# EAGLE board M1091X (EAGLE 6.6.0)
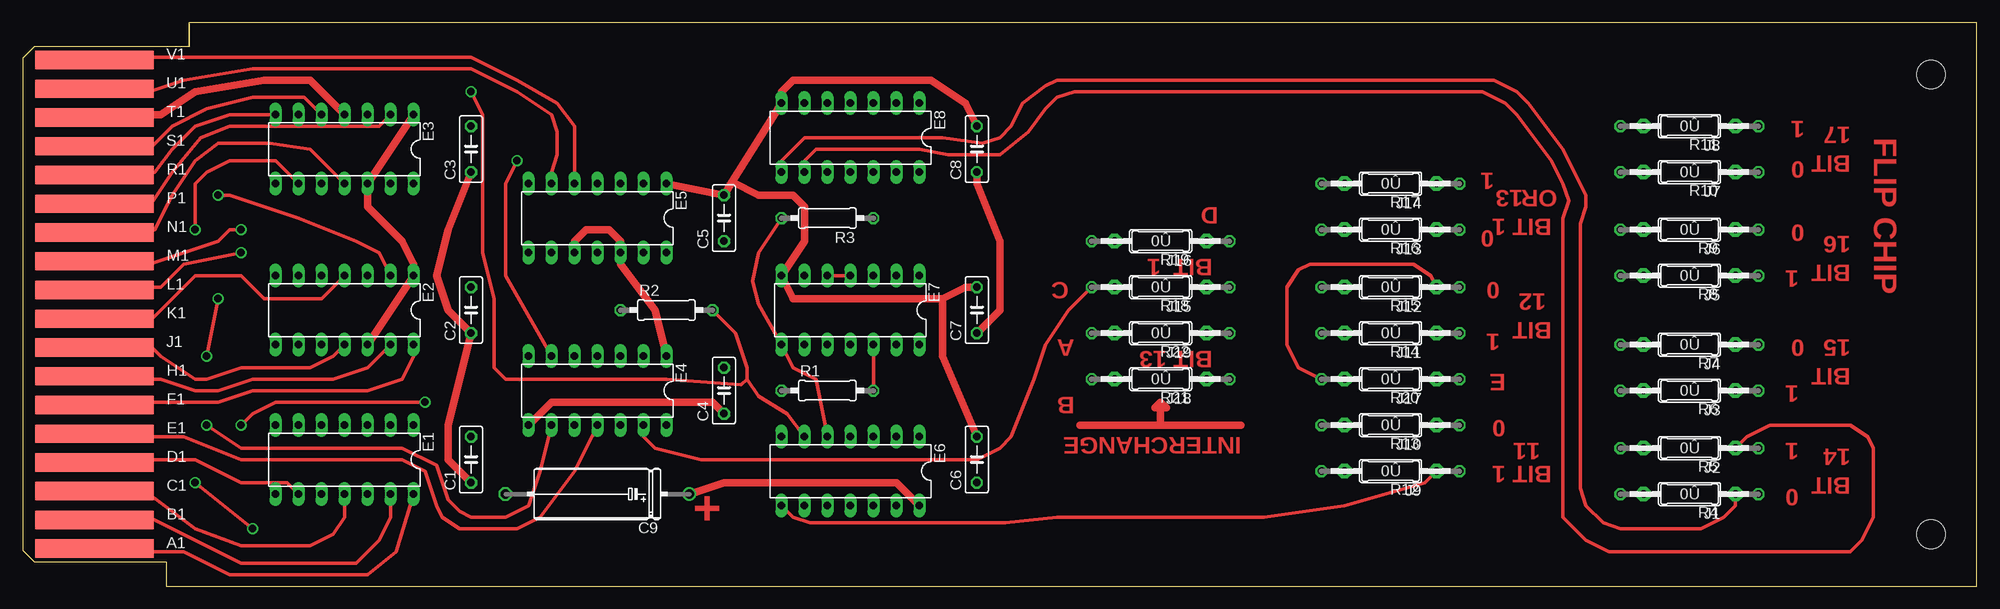
[diagram p0: board, top side]
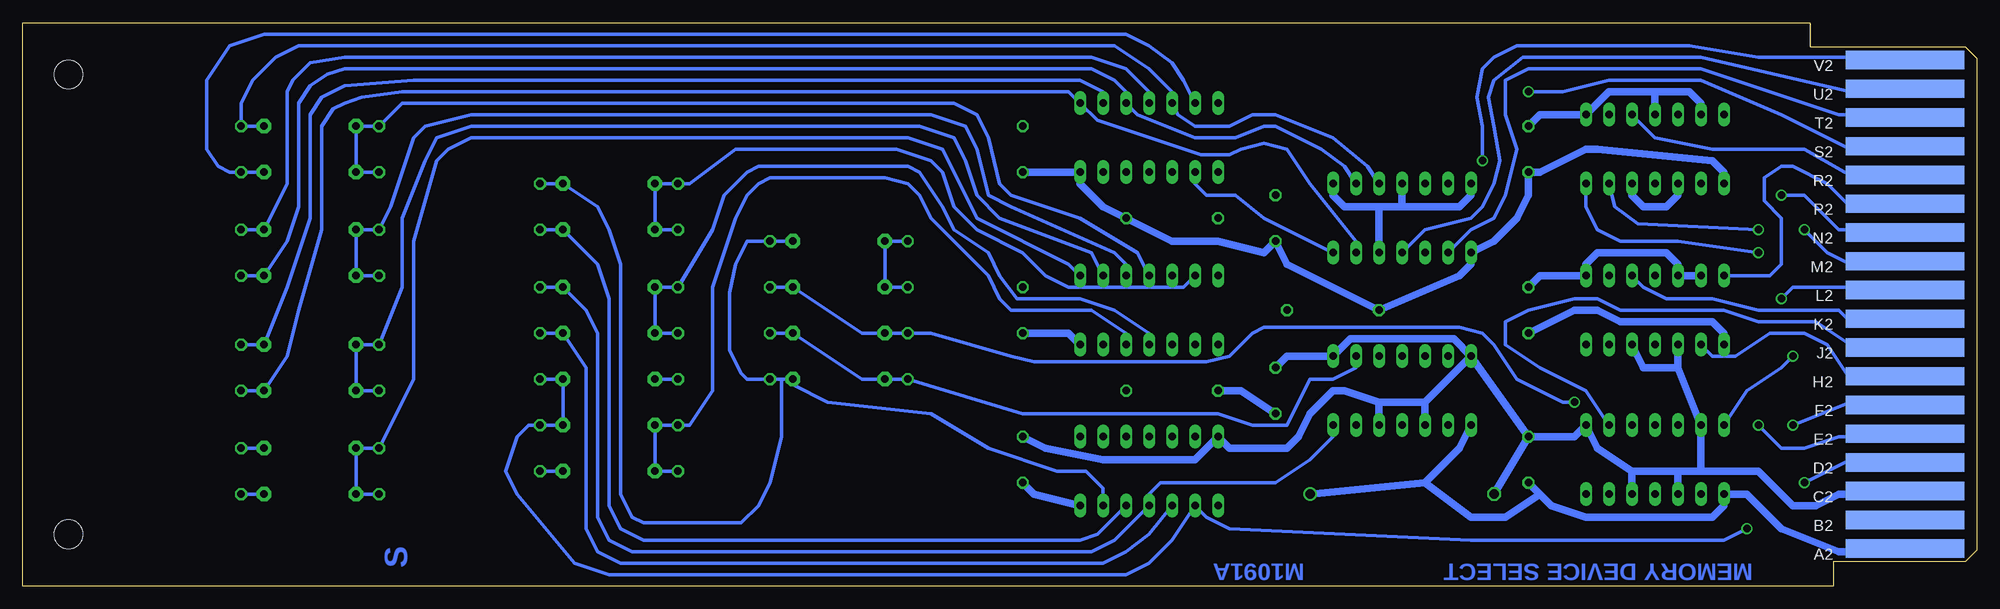
[diagram p1: board, bottom side, seen from below]

Size 215.9 x 62.23 mm. Coordinates in mm from the lower left corner, seen from the top.
Copper layers (1+16): Top 0.035mm / dielectric 1.5mm / Bottom 0.035mm
Design rules "16mils": minimum track width 16mil, minimum drill 32mil, track to track 15mil, track to pad 10mil, pad to pad 10mil, via to via 10mil, smd to smd 10mil, copper to edge 13mil, drill to drill 10mil, minimum pad ring 10mil, minimum via ring 8mil, stop-mask expansion 0mil, vias tented up to drill 0mil, thermal gap 10mil
Net classes: 1 supply: width 0.813 mm

## Footprints (pad centres in the part's own frame; a part is rotated, then mirrored left to right if it is on the bottom)
C050-025X075 = drill 0.813 octagon: 1 -2.54,0; 2 2.54,0
E12-8 = drill 1.016: + -10.16,0 | drill 1.016 octagon: - 10.16,0
DIL14 = drill 0.813 long: 1 -7.62,-3.81; 2 -5.08,-3.81; 3 -2.54,-3.81; 4 0,-3.81; 5 2.54,-3.81; 6 5.08,-3.81; 7 7.62,-3.81; 8 7.62,3.81; 9 5.08,3.81; 10 2.54,3.81; 11 0,3.81; 12 -2.54,3.81; 13 -5.08,3.81; 14 -7.62,3.81
0R/10 = drill 0.813 pad 1.6 octagon: 1 -5.08,0; 2 5.08,0
0207/10 = drill 0.813 octagon: 1 -5.08,0; 2 5.08,0
0207/15 = drill 0.813 octagon: 1 -7.62,0; 2 7.62,0
SINGLE-LONG = hole 3.175: 210.82,56.515; 210.82,5.715
EDGE-CON2 = smd 13.106 x 2.032: A1 7.938,4.128; B1 7.938,7.303; C1 7.938,10.477; D1 7.938,13.652; E1 7.938,16.828; F1 7.938,20.003; H1 7.938,23.177; J1 7.938,26.352; K1 7.938,29.527; L1 7.938,32.703; M1 7.938,35.877; N1 7.938,39.053; P1 7.938,42.227; R1 7.938,45.403; S1 7.938,48.578; T1 7.938,51.752; U1 7.938,54.928; V1 7.938,58.102 | smd 13.106 x 2.032 bottom: A2 7.938,4.128; B2 7.938,7.303; C2 7.938,10.477; D2 7.938,13.652; E2 7.938,16.828; F2 7.938,20.003; H2 7.938,23.177; J2 7.938,26.352; K2 7.938,29.527; L2 7.938,32.703; M2 7.938,35.877; N2 7.938,39.053; P2 7.938,42.227; R2 7.938,45.403; S2 7.938,48.578; T2 7.938,51.752; U2 7.938,54.928; V2 7.938,58.102

## Placement (x,y rotation side)
C1  .01uF  [C050-025X075]  49.53,13.97 90 top
C2  .01uF  [C050-025X075]  49.53,30.48 90 top
C3  .01uF  [C050-025X075]  49.53,48.26 90 top
C4  .01uF  [C050-025X075]  77.47,21.59 90 top
C5  .01uF  [C050-025X075]  77.47,40.64 90 top
C6  .01uF  [C050-025X075]  105.41,13.97 90 top
C7  .01uF  [C050-025X075]  105.41,30.48 90 top
C8  .01uF  [C050-025X075]  105.41,48.26 90 top
C9  6.8uF  [E12-8]  63.5,10.16 180 top
E1  SP380N  [DIL14]  35.56,13.97 180 top
E2  SP380N  [DIL14]  35.56,30.48 180 top
E3  SP380N  [DIL14]  35.56,48.26 180 top
E4  SP380N  [DIL14]  63.5,21.59 180 top
E5  SP380N  [DIL14]  63.5,40.64 180 top
E6  74H04N  [DIL14]  91.44,12.7 180 top
E7  74H30N  [DIL14]  91.44,30.48 180 top
E8  74H04N  [DIL14]  91.44,49.53 180 top
J1  [0R/10]  184.15,10.16 180 top
J2  [0R/10]  184.15,15.24 180 top
J3  [0R/10]  184.15,21.59 180 top
J4  [0R/10]  184.15,26.67 180 top
J5  [0R/10]  184.15,34.29 180 top
J6  [0R/10]  184.15,39.37 180 top
J7  [0R/10]  184.15,45.72 180 top
J8  [0R/10]  184.15,50.8 180 top
J9  [0R/10]  151.13,12.7 180 top
J10  [0R/10]  151.13,17.78 180 top
J11  [0R/10]  151.13,27.94 180 top
J12  [0R/10]  151.13,33.02 180 top
J13  [0R/10]  151.13,39.37 180 top
J14  [0R/10]  151.13,44.45 180 top
J15  [0R/10]  125.73,33.02 180 top
J16  [0R/10]  125.73,38.1 180 top
J17  [0R/10]  151.13,22.86 180 top
J18  [0R/10]  125.73,22.86 180 top
J19  [0R/10]  125.73,27.94 180 top
R1  1K  [0207/10]  88.9,21.59 0 top
R2  470  [0207/10]  71.12,30.48 0 top
R3  1K  [0207/10]  88.9,40.64 180 top
R4  0  [0207/15]  184.15,10.16 180 top
R5  0  [0207/15]  184.15,15.24 180 top
R6  0  [0207/15]  184.15,21.59 180 top
R7  0  [0207/15]  184.15,26.67 180 top
R8  0  [0207/15]  184.15,34.29 180 top
R9  0  [0207/15]  184.15,39.37 180 top
R10  0  [0207/15]  184.15,45.72 180 top
R11  0  [0207/15]  184.15,50.8 180 top
R12  0  [0207/15]  151.13,12.7 180 top
R13  0  [0207/15]  151.13,17.78 180 top
R14  0  [0207/15]  151.13,27.94 180 top
R15  0  [0207/15]  151.13,33.02 180 top
R16  0  [0207/15]  151.13,39.37 180 top
R17  0  [0207/15]  151.13,44.45 180 top
R18  0  [0207/15]  125.73,33.02 180 top
R19  0  [0207/15]  125.73,38.1 180 top
R20  0  [0207/15]  151.13,22.86 180 top
R21  0  [0207/15]  125.73,22.86 180 top
R22  0  [0207/15]  125.73,27.94 180 top
U$1  OUTLINE-SINGLE-LONG  [SINGLE-LONG]  0,0 0 top
U$2  [EDGE-CON2]  0,0 0 top

## Library data of the parts
C1-C8 R1-R22 = rcl
C9 E1-E5 E7 U$1 U$2 = dec-con
E6 E8 = 74xx-us
J1-J19 = jumper

## Nets
A1: E1.14 U$2.A1
B1: E1.13 U$2.B1
C1: E1.11 U$2.C1
D1: E1.9 U$2.D1
D2: E6.9 J10.1 J17.1 R13.1 R20.1 U$2.D2
E1: E4.11 U$2.E1
E2: J15.1 J19.2 R18.1 R22.2 U$2.E2
F1: E2.14 U$2.F1
F2: E4.9 U$2.F2
GND [supply]: C1.2 C2.2 C3.2 C4.2 C5.2 C6.2 C7.2 C8.2 C9.- E1.1 E1.6 E1.10 E1.12 E2.1 E2.5 E2.6 E2.10 E2.12 E3.1 E3.4 E3.6 E3.10 E3.12 E4.1 E4.7 E4.10 E4.12 E5.1 E5.4 E5.7 E5.10 E5.12 E6.7 E7.7 E8.7 U$2.C2 U$2.T1
H1: E2.13 U$2.H1
H2: E2.9 U$2.H2
J1: E2.11 U$2.J1
J2: E1.2 U$2.J2
K1: E2.4 U$2.K1
K2: E2.3 U$2.K2
L1: E3.14 U$2.L1
L2: E1.7 U$2.L2
M1: E3.13 U$2.M1
M2: E3.9 U$2.M2
N1: E3.11 U$2.N1
N2: E2.2 U$2.N2
N$2: E7.12 J9.2 J10.2 R1.2 R12.2 R13.2
N$4: E6.5 E7.8 R3.2
N$10: E7.1 J1.2 J2.2 R4.2 R5.2
N$17: E8.8 J1.1 R4.1
N$18: E5.14 E8.9 J2.1 R5.1
N$45: E4.13 J15.2 J16.2 R18.2 R19.2
N$46: E4.14 E6.11 J12.1 J17.2 R15.1 R20.2
N$47: E4.2 J18.2 J19.1 R21.2 R22.1
N$56: E5.3 E8.5 J8.1 R11.1
N$57: E5.13 E8.1 J3.1 R6.1
N$59: E5.2 E8.3 J5.1 R8.1
N$68: E6.10 J11.1 R14.1
N$76: E6.8 J9.1 R12.1
N$77: E6.13 J14.1 J16.1 J18.1 R17.1 R19.1 R21.1
N$78: E6.12 J13.1 R16.1
N$82: E8.2 J4.1 R7.1
N$84: E8.4 J6.1 R9.1
N$86: E8.6 J7.1 R10.1
N$91: E7.11 J11.2 J12.2 R14.2 R15.2
N$96: E7.4 E7.5 J7.2 J8.2 R10.2 R11.2
N$98: E7.6 J13.2 J14.2 R16.2 R17.2
N$101: E7.2 J3.2 J4.2 R6.2 R7.2
N$136: E7.3 J5.2 J6.2 R8.2 R9.2
P1: E3.2 U$2.P1
P2: E2.7 U$2.P2
R1: E3.7 U$2.R1
R2: E3.3 U$2.R2
S1: E3.5 U$2.S1
S2: E6.6 R2.2 U$2.S2
T2: E5.9 U$2.T2
U1: E5.6 U$2.U1
U2: E5.11 U$2.U2
V1: E5.5 U$2.V1
V2: E4.6 U$2.V2
VCC [supply]: C1.1 C2.1 C3.1 C4.1 C5.1 C6.1 C7.1 C8.1 C9.+ E1.8 E2.8 E3.8 E4.8 E5.8 E6.14 E7.14 E8.14 R1.1 R2.1 R3.1 U$2.A2

## Tracks (layer width: path | path; a pad name or v marks a point on that pad's centre or on a via)
A1
  Top 0.406: E1.14 41.28,3.81 38.1,1.27 22.86,1.27 17.78,3.81 8.89,3.81 U$2.A1
B1
  Top 0.406: U$2.B1 7.62,7.62 13.97,7.62 24.13,2.54 36.83,2.54 39.37,5.08 40.64,7.62 E1.13
C1
  Top 0.406: E1.11 35.56,7.62 34.29,5.71 31.75,4.45 24.13,4.45 19.05,6.35 13.97,10.16 8.89,10.16 U$2.C1
D1
  Top 0.406: U$2.D1 8.89,13.97 19.05,13.97 24.13,11.43 29.21,11.43 E1.9
D2  (via drill 0.81)
  Top 0.406: v19.05,11.43 v25.4,6.35
  Bottom 0.406: U$2.D2 8.89,13.97 13.97,13.97 v19.05,11.43 | v25.4,6.35 27.94,5.08 55.88,5.08 82.55,6.35 85.09,7.62 E6.9 88.9,5.08 91.44,2.54 93.98,1.27 151.13,1.27 154.94,2.54 161.29,10.16 162.56,12.7 161.29,16.51 160.02,17.78 R13.1 J10.1 J17.1 R20.1
E1
  Top 0.406: U$2.E1 8.89,16.51 17.78,16.51 24.13,13.97 41.91,13.97 44.45,12.7 45.72,8.89 46.36,7.62 48.26,6.35 54.61,6.35 57.15,7.62 60.96,12.7 E4.11
E2  (via drill 0.81)
  Top 0.406: v24.13,17.78 25.4,19.05 27.94,20.32 v44.45,20.32
  Bottom 0.406: U$2.E2 7.62,16.51 15.24,16.51 19.05,15.24 21.59,15.24 v24.13,17.78 | v44.45,20.32 45.72,20.32 50.8,22.86 53.34,26.67 54.61,27.94 57.15,28.57 78.74,28.57 80.01,27.94 82.55,25.4 85.09,24.77 104.14,24.77 106.68,25.4 115.57,27.94 R22.2 J19.2 123.19,27.94 J15.1 R18.1
F1
  Top 0.406: U$2.F1 8.89,20.32 21.59,20.32 25.4,21.59 38.1,21.59 41.91,22.86 43.18,25.4 E2.14
F2  (via drill 0.81)
  Top 0.406: v20.32,17.78 24.13,15.24 41.91,15.24 45.72,13.34 46.99,9.53 48.26,8.26 49.53,7.62 53.34,7.62 55.88,8.89 57.15,12.7 E4.9
  Bottom 0.406: U$2.F2 8.89,20.32 13.97,20.32 v20.32,17.78
GND
  Top 0.813: E5.1 C5.2 78.4,44.66 | 78.4,44.66 E8.7 83.82,54.61 85.09,55.88 100.33,55.88 104.14,53.34 C8.2 | 78.4,44.66 81.28,43.18 85.09,43.18 86.36,41.91 86.36,38.1 E7.7 85.09,31.75 101.6,31.75 | C7.2 104.14,33.02 101.6,31.75 | C6.2 101.6,25.4 101.6,31.75 | U$2.T1 7.62,52.07 15.24,52.07 19.05,54.61 26.67,55.88 31.75,55.88 E3.4 | E2.12 E2.1 43.18,35.56 41.91,38.1 38.1,41.91 E3.12 E3.1 | E4.1 69.85,30.48 66.04,35.56 E5.12 66.04,38.1 64.77,39.37 62.23,39.37 60.96,38.1 E5.10
  Bottom 0.813: U$2.C2 8.89,10.16 15.24,10.16 17.78,8.89 20.32,8.89 24.13,12.7 30.48,12.7 | 30.48,12.7 33.02,12.7 | 33.02,12.7 38.1,12.7 | 38.1,12.7 41.91,15.24 E1.1 44.45,16.51 C1.2 | E1.12 38.1,12.7 | 30.48,12.7 E1.6 33.02,24.13 | C2.2 48.26,34.29 E2.1 43.18,35.56 41.91,36.83 34.29,36.83 33.02,35.56 E2.5 E2.6 | C3.2 48.26,52.07 E3.1 40.64,54.61 35.56,54.61 | E1.10 33.02,12.7 | C1.2 C9.- | E3.4 35.56,54.61 | 35.56,54.61 31.75,54.61 30.48,53.34 E3.6 | E3.10 33.02,43.18 34.29,41.91 36.83,41.91 38.1,43.18 E3.12 | 33.02,24.13 36.83,24.13 E2.12 | E2.10 33.02,24.13 | E4.7 C1.2 | E4.10 60.96,20.32 | 60.96,20.32 E4.7 | E4.12 66.04,20.32 | 66.04,20.32 60.96,20.32 | C4.2 76.2,25.4 E4.1 69.22,27.3 57.79,27.3 E4.7 | 66.04,20.32 69.85,21.59 71.12,21.59 73.66,19.05 74.93,16.51 76.2,15.24 82.55,15.24 E6.7 86.36,13.97 96.52,13.97 102.87,15.24 C6.2 | E5.7 55.88,43.18 57.15,41.91 63.5,41.91 | 63.5,41.91 E5.4 | E5.1 71.12,43.18 69.85,41.91 66.04,41.91 | 66.04,41.91 63.5,41.91 | E5.12 66.04,41.91
H1
  Top 0.406: U$2.H1 8.89,22.86 15.24,22.86 19.05,21.59 21.59,21.59 25.4,22.86 34.29,22.86 38.1,24.13 E2.13
H2
  Bottom 0.406: U$2.H2 8.89,22.86 13.97,22.86 16.51,26.67 19.05,27.94 22.86,27.94 26.67,25.4 29.21,25.4 E2.9
J1
  Top 0.406: U$2.J1 8.89,26.67 13.97,26.67 15.24,25.4 19.05,22.86 20.32,22.86 24.13,24.13 31.75,24.13 34.29,25.4 E2.11
J2
  Bottom 0.406: U$2.J2 8.89,26.67 13.97,26.67 17.78,29.21 24.13,29.21 27.94,30.48 39.37,30.48 41.91,31.75 44.45,31.75 49.53,30.48 52.07,29.21 52.07,26.67 48.26,24.13 43.18,21.59 E1.2
K1
  Top 0.406: U$2.K1 8.89,29.21 13.97,29.21 19.05,34.29 24.13,34.29 26.67,31.75 33.02,31.75 E2.4
K2
  Bottom 0.406: U$2.K2 8.89,29.21 13.97,29.21 15.24,30.48 24.13,30.48 29.21,31.75 34.29,31.75 36.83,33.02 E2.3
L1  (via drill 0.81)
  Top 0.406: U$2.L1 8.89,33.02 15.24,33.02 17.78,35.56 v24.13,36.83
  Bottom 0.406: v24.13,36.83 33.02,38.1 39.37,38.1 41.91,39.37 43.18,41.91 E3.14
L2  (via drill 0.81)
  Top 0.406: v20.32,25.4 v21.59,31.75
  Bottom 0.406: E1.7 25.4,21.59 21.59,24.13 v20.32,25.4 | U$2.L2 13.97,33.02 20.32,33.02 v21.59,31.75
M1  (via drill 0.81)
  Top 0.406: U$2.M1 8.89,35.56 13.97,35.56 21.59,38.1 22.86,39.37 v24.13,39.37
  Bottom 0.406: v24.13,39.37 37.47,40.01 40.01,41.91 E3.13
M2  (via drill 0.81)
  Top 0.406: v19.05,39.37 19.05,44.45 20.32,45.72 22.86,46.99 27.94,46.99 E3.9
  Bottom 0.406: U$2.M2 8.89,35.56 13.97,35.56 16.51,36.83 v19.05,39.37
N1
  Top 0.406: U$2.N1 8.89,39.37 14.61,39.37 16.51,43.18 19.05,46.99 21.59,48.9 27.31,48.9 31.75,48.26 E3.11
N2  (via drill 0.81)
  Top 0.406: v21.59,43.18 22.86,43.18 30.48,40.64 36.83,38.1 39.37,36.83 E2.2
  Bottom 0.406: U$2.N2 8.89,39.37 15.24,39.37 19.05,43.18 v21.59,43.18
N$2
  Top 0.406: R1.2 E7.12
  Bottom 0.406: E7.12 93.98,27.94 97.79,30.48 106.68,30.48 107.95,31.75 109.22,34.29 115.57,40.64 116.84,43.18 118.11,44.45 120.65,45.09 133.35,45.09 134.62,44.45 135.89,43.18 137.16,40.64 139.7,33.02 139.7,21.59 142.24,17.78 R13.2 J10.2 J9.2 R12.2
N$4
  Top 0.406: R3.2 81.28,36.83 80.65,33.66 81.28,31.11 E7.8 85.09,24.13 87.63,22.86 E6.5
N$10
  Bottom 0.406: R4.2 J1.2 J2.2 R5.2 172.72,22.86 172.72,38.1 170.18,46.99 168.91,48.26 166.37,49.53 118.11,49.53 114.3,48.26 110.49,40.64 100.33,35.56 E7.1
N$14
  Top 0.813: 116.84,17.78 125.73,17.78 | 125.73,17.78 134.62,17.78 | 125.73,17.78 125.73,20.32 | 125.73,20.32 125.1,19.68 126.37,19.68 125.73,20.32
N$17
  Top 0.406: J1.1 189.23,8.89 187.96,7.62 185.42,6.35 176.53,6.35 174.63,6.99 172.72,8.89 172.09,10.79 172.09,40.01 172.72,41.91 172.72,43.18 170.18,48.26 166.37,53.34 165.1,54.61 162.56,55.88 114.3,55.88 113.03,55.24 110.49,53.34 109.22,50.8 107.95,49.53 106.05,48.9 101.6,49.53 86.36,49.53 83.82,46.99 E8.8
  Bottom 0.406: R4.1 J1.1
N$18
  Top 0.406: J2.1 190.5,16.51 193.04,17.78 201.93,17.78 203.84,16.51 204.47,15.24 204.47,7.62 203.2,5.08 201.93,3.81 175.26,3.81 172.72,5.08 170.18,7.62 170.18,40.64 170.82,42.55 170.18,44.45 168.91,46.99 165.1,52.07 163.83,53.34 161.29,54.61 116.21,54.61 114.3,53.98 113.03,52.7 111.13,50.16 107.95,47.62 102.24,47.62 99.06,48.26 87.63,48.26 86.36,46.99 E8.9
  Bottom 0.406: E5.14 78.74,40.64 81.92,43.18 85.09,43.18 86.36,44.45 E8.9 | R5.1 J2.1
N$45
  Top 0.406: E4.13 68.58,16.51 69.85,15.24 74.93,13.97 105.41,13.97 107.95,15.24 109.22,16.51 111.76,22.86 113.03,26.67 115.57,30.48 R18.2
  Bottom 0.406: R19.2 J16.2 J15.2 R18.2
N$46
  Top 0.406: R20.2 140.97,24.13 139.7,26.67 139.7,33.02 140.97,34.92 142.24,35.56 153.67,35.56 155.58,34.29 J12.1
  Bottom 0.406: E4.14 71.12,16.51 73.66,13.97 77.47,11.43 90.17,11.43 91.44,10.16 E6.11 95.25,5.08 97.79,3.81 148.59,3.81 151.13,5.08 152.4,7.62 152.4,27.94 153.67,30.48 J12.1 R15.1 | R20.2 J17.2
N$47
  Bottom 0.406: E4.2 68.58,24.13 71.12,22.86 73.66,22.86 76.2,17.78 80.01,17.78 83.82,19.05 105.41,19.05 R21.2 J18.2 123.19,22.86 J19.1 R22.1
N$56
  Bottom 0.406: E5.3 67.31,46.35 71.12,49.53 77.47,52.07 80.01,52.07 82.55,50.8 86.36,50.8 88.27,52.07 E8.5 88.9,54.61 91.44,57.15 95.25,59.69 185.42,59.69 187.96,58.42 190.5,55.88 191.77,53.34 R11.1 J8.1
N$57
  Bottom 0.406: E5.13 68.58,38.1 73.66,44.45 76.2,48.26 78.74,48.9 81.28,48.26 82.55,47.62 85.73,47.62 97.16,51.44 E8.1 100.33,54.61 173.99,54.61 178.44,53.98 180.34,53.34 181.61,52.7 182.88,50.8 182.88,39.37 185.42,30.48 186.69,25.4 J3.1 R6.1
N$59
  Bottom 0.406: E5.2 69.85,46.35 72.39,48.26 77.47,50.8 78.74,50.8 81.92,49.53 86.36,49.53 92.71,52.07 E8.3 93.98,54.61 95.25,55.88 97.79,57.15 180.34,57.15 182.25,56.52 184.15,55.24 185.42,53.34 185.42,41.91 186.69,38.1 J5.1 R8.1
N$68
  Bottom 0.406: E6.10 91.44,5.71 93.98,3.81 96.52,2.54 149.86,2.54 152.4,3.81 153.67,6.35 153.67,24.13 J11.1 R14.1
N$76
  Top 0.406: E6.8 85.09,7.62 87,6.99 108.59,6.99 114.3,7.62 137.16,7.62 146.05,8.89 154.94,11.43 J9.1
  Bottom 0.406: R12.1 J9.1
N$77
  Bottom 0.406: E6.13 96.52,10.79 98.43,12.7 101.6,12.7 109.22,15.24 115.57,19.05 127,20.32 130.81,22.23 J18.1 132.08,22.86 | 132.08,22.86 R21.1 135.89,22.86 136.53,23.5 137.8,26.04 137.8,32.38 137.16,35.56 135.89,38.1 R19.1 J16.1 | 132.08,22.86 132.08,16.51 133.35,11.43 134.62,8.89 136.53,6.99 147.32,6.99 148.59,7.62 149.86,10.16 149.86,35.56 151.13,39.37 152.4,41.91 J14.1 R17.1
N$78
  Bottom 0.406: E6.12 97.16,5.71 99.06,5.08 147.32,5.08 149.86,6.35 151.13,8.89 151.13,31.75 152.4,35.56 J13.1 R16.1
N$82
  Bottom 0.406: E8.2 96.52,54.61 99.06,55.88 172.72,55.88 180.34,55.24 182.88,53.98 184.15,52.07 184.15,40.64 186.69,33.02 J4.1 R7.1
N$84
  Bottom 0.406: E8.4 91.44,54.61 93.98,57.15 97.79,58.42 180.34,58.42 184.15,57.78 186.06,55.88 186.69,54.61 186.69,44.45 J6.1 R9.1
N$86
  Bottom 0.406: E8.6 87.63,55.88 88.9,57.78 91.44,59.69 93.98,60.96 189.23,60.96 193.04,59.69 195.58,55.88 195.58,48.26 194.31,46.35 193.04,45.72 R10.1 J7.1
N$91
  Bottom 0.406: E7.11 91.44,27.94 95.25,30.48 99.06,31.75 106.05,31.75 107.95,34.29 109.22,36.83 113.03,39.37 114.3,41.91 116.84,45.72 118.11,46.35 134.62,46.35 135.89,45.72 138.43,43.18 139.7,39.37 R15.2 J12.2 J11.2 R14.2
N$96
  Top 0.406: E7.4 E7.5
  Bottom 0.406: R10.2 J7.2 J8.2 R11.2 173.99,53.34 113.03,53.34 110.49,52.07 109.22,49.53 107.95,44.45 106.68,43.18 99.06,40.64 92.71,36.83 E7.4
N$98
  Bottom 0.406: E7.6 87.63,33.02 100.33,33.02 102.87,34.29 105.41,36.83 110.49,39.37 113.03,41.91 114.3,45.72 115.57,46.99 119.38,48.26 137.16,48.26 142.24,44.45 R17.2 J14.2 J13.2 R16.2
N$101
  Bottom 0.406: R6.2 J3.2 J4.2 R7.2 173.99,33.02 173.99,40.64 171.45,46.99 170.18,49.53 166.37,50.8 116.84,50.8 113.03,49.53 111.76,46.99 110.49,43.18 107.95,40.64 97.79,36.83 E7.2
N$136
  Bottom 0.406: R8.2 J5.2 J6.2 R9.2 175.26,41.91 172.72,49.53 171.45,50.8 166.37,52.07 115.57,52.07 111.76,50.8 110.49,48.26 109.22,43.18 106.68,41.91 95.25,36.83 93.98,35.56 E7.3
P1
  Top 0.406: U$2.P1 8.89,41.91 13.97,41.91 16.51,45.72 19.69,49.53 22.86,50.8 39.37,50.8 E3.2
P2
  Bottom 0.406: U$2.P2 8.89,41.91 13.97,41.91 16.51,44.45 20.32,46.35 21.59,46.35 23.5,45.09 23.5,42.55 21.59,40.64 21.59,35.56 22.86,34.29 E2.7
R1
  Top 0.406: U$2.R1 8.89,45.72 14.61,45.72 16.51,48.26 19.05,50.8 22.86,52.07 E3.7
R2
  Bottom 0.406: U$2.R2 8.89,45.72 14.61,45.72 19.05,48.26 29.21,48.26 35.56,49.53 E3.3
S1
  Top 0.406: U$2.S1 8.89,48.26 13.97,48.26 16.51,50.8 20.32,52.7 25.4,53.98 31.12,53.98 E3.5
S2  (via drill 0.81)
  Top 0.406: v49.53,54.61 50.8,52.07 50.8,36.83 52.07,31.75 52.07,24.13 53.34,22.86 71.12,22.86 79.38,22.23 80.01,22.86 | R2.2 78.74,27.94 80.01,24.13 80.01,22.86 | 80.01,22.86 81.28,20.95 84.46,19.05 E6.6
  Bottom 0.406: U$2.S2 10.16,48.26 13.97,48.26 21.59,52.07 30.48,55.88 40.64,55.88 45.72,54.61 v49.53,54.61
T2
  Bottom 0.406: U$2.T2 8.89,52.07 15.24,52.07 30.48,57.15 49.53,57.15 52.07,55.88 52.07,52.07 50.8,48.26 52.07,43.18 53.34,40.64 55.88,39.37 E5.9
U1
  Top 0.406: U$2.U1 8.89,54.61 13.97,54.61 17.78,55.88 25.4,57.15 49.53,57.15 54.61,54.61 58.42,52.07 59.06,50.16 59.06,47.62 58.42,45.72 E5.6
U2
  Bottom 0.406: U$2.U2 8.89,54.61 13.97,54.61 30.48,58.42 50.17,58.42 53.34,55.88 53.98,53.98 53.34,50.8 52.71,46.99 53.34,44.45 54.61,41.91 55.88,40.64 60.96,39.37 E5.11
V1
  Top 0.406: U$2.V1 8.89,58.42 49.53,58.42 54.61,55.88 59.06,53.34 60.96,50.8 E5.5
V2  (via drill 0.81)
  Top 0.406: E4.6 53.34,34.29 53.34,44.45 v54.61,46.99
  Bottom 0.406: U$2.V2 8.89,58.42 24.13,58.42 31.75,59.69 50.8,59.69 53.34,58.42 54.61,57.15 55.25,53.98 54.61,50.8 v54.61,46.99
VCC
  Top 0.813: C9.+ 77.47,11.43 96.52,11.43 E6.14 | C7.1 107.95,30.48 107.95,38.1 105.41,44.45 C8.1 | C3.1 46.99,39.37 45.72,34.29 46.99,30.48 C2.1 46.99,17.78 46.99,13.97 C1.1 | C4.1 76.2,20.32 58.42,20.32 E4.8
  Bottom 0.813: U$2.A2 8.89,3.81 15.24,3.81 21.59,6.35 25.4,10.16 E1.8 27.94,8.89 29.21,7.62 43.18,7.62 46.99,8.89 48.26,10.16 | C2.1 44.45,30.48 41.91,30.48 39.37,29.21 29.21,29.21 27.94,27.94 E2.8 | E3.8 27.94,45.72 29.21,46.99 41.91,48.26 43.18,48.26 48.26,45.72 C3.1 49.53,43.18 50.8,40.64 53.34,38.1 E5.8 55.88,35.56 57.15,34.29 R2.1 76.2,35.56 C5.1 78.74,36.83 83.82,38.1 88.9,38.1 R3.1 96.52,41.91 99.06,44.45 E8.14 C8.1 | C9.+ 60.96,11.43 | 60.96,11.43 57.15,15.24 E4.8 | C1.1 48.26,10.16 | 48.26,10.16 52.07,7.62 55.88,7.62 60.96,11.43 | E6.14 104.14,10.16 C6.1 | E7.14 100.33,27.94 C7.1 | C4.1 81.28,21.59 R1.1

## Text on the board
Top: 1 | 17 | FLIP CHIP | BIT | 0 | 1 | 13 | OR | D | 1 | BIT | 0 | 0 | 16 | 1 | BIT | BIT | 1 | C | 0 | 12 | BIT | 1 | A | 0 | 15 | 13 | BIT | BIT | E | 1 | B | 0 | INTERCHANGE | 11 | 1 | 14 | 1 | BIT | BIT | 0 | +
Bottom: S | MEMORY DEVICE SELECT | M1091A